# Altium PCB temperature.PcbDoc
Units mm, origin at the board's own origin, x right, y up, seen from the top; angles counter-clockwise.
Board outline 25 x 34.92 mm, 2 copper layers (Top Layer, Bottom Layer); 16 components, 12 nets, 47 pads, 44 vias.
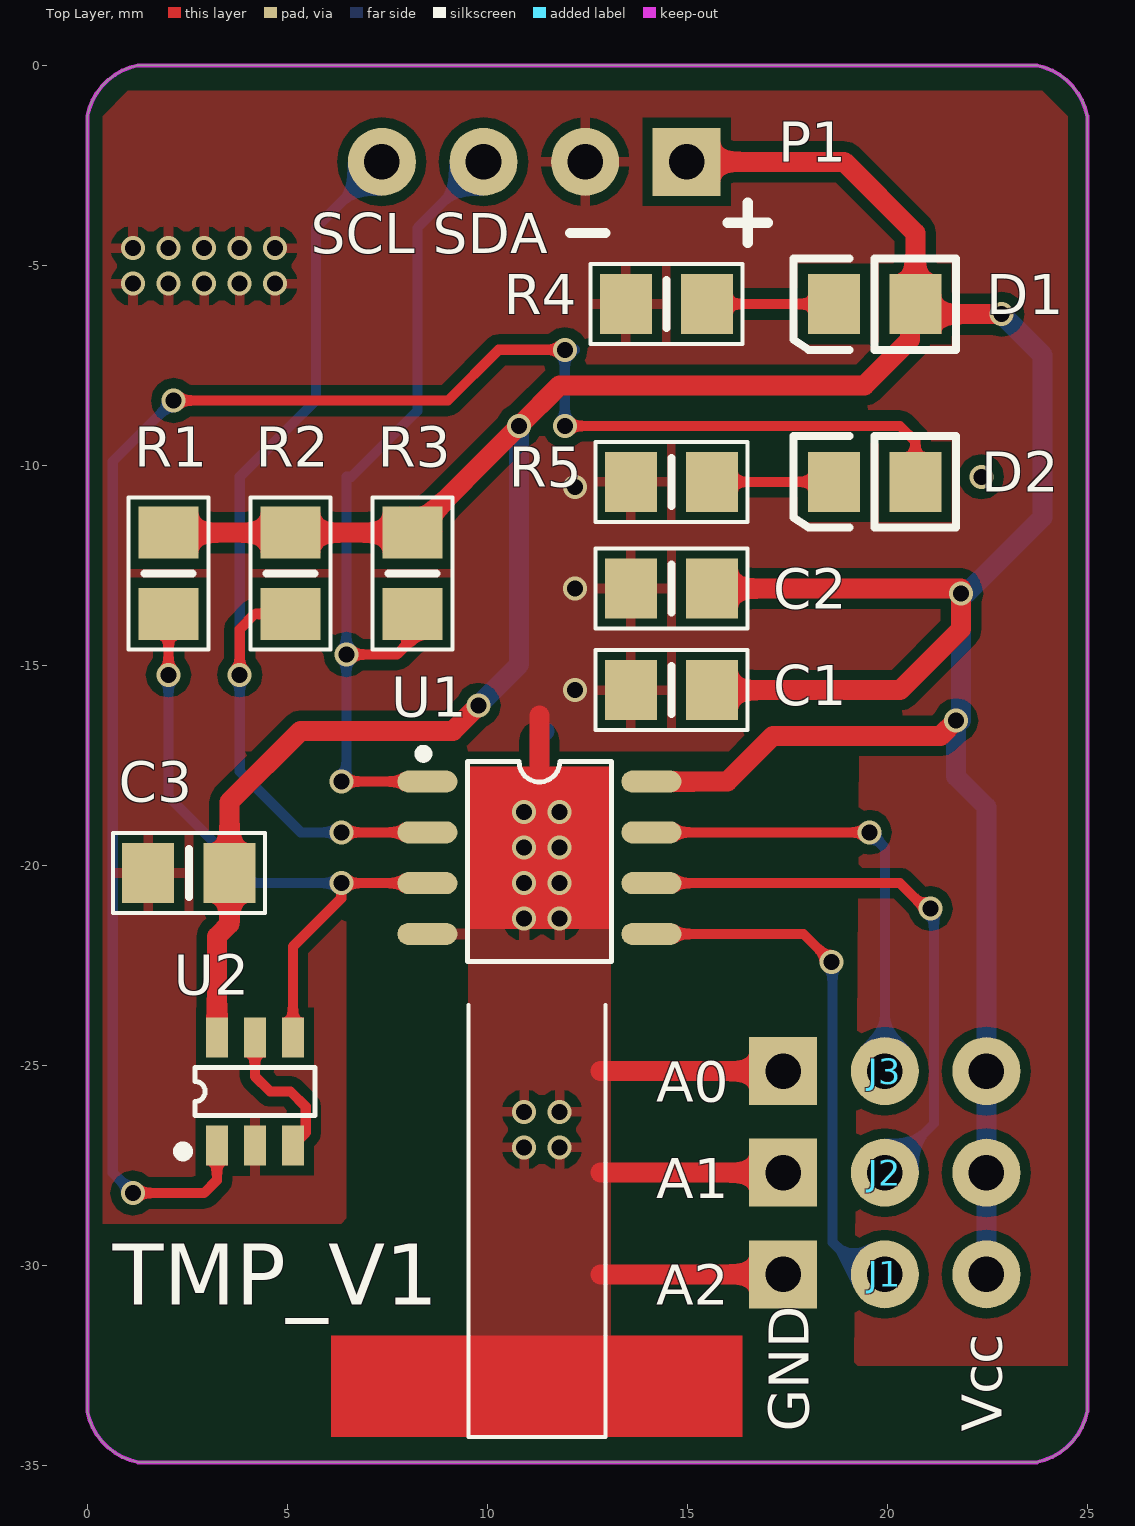
[diagram p0: Top Layer view]
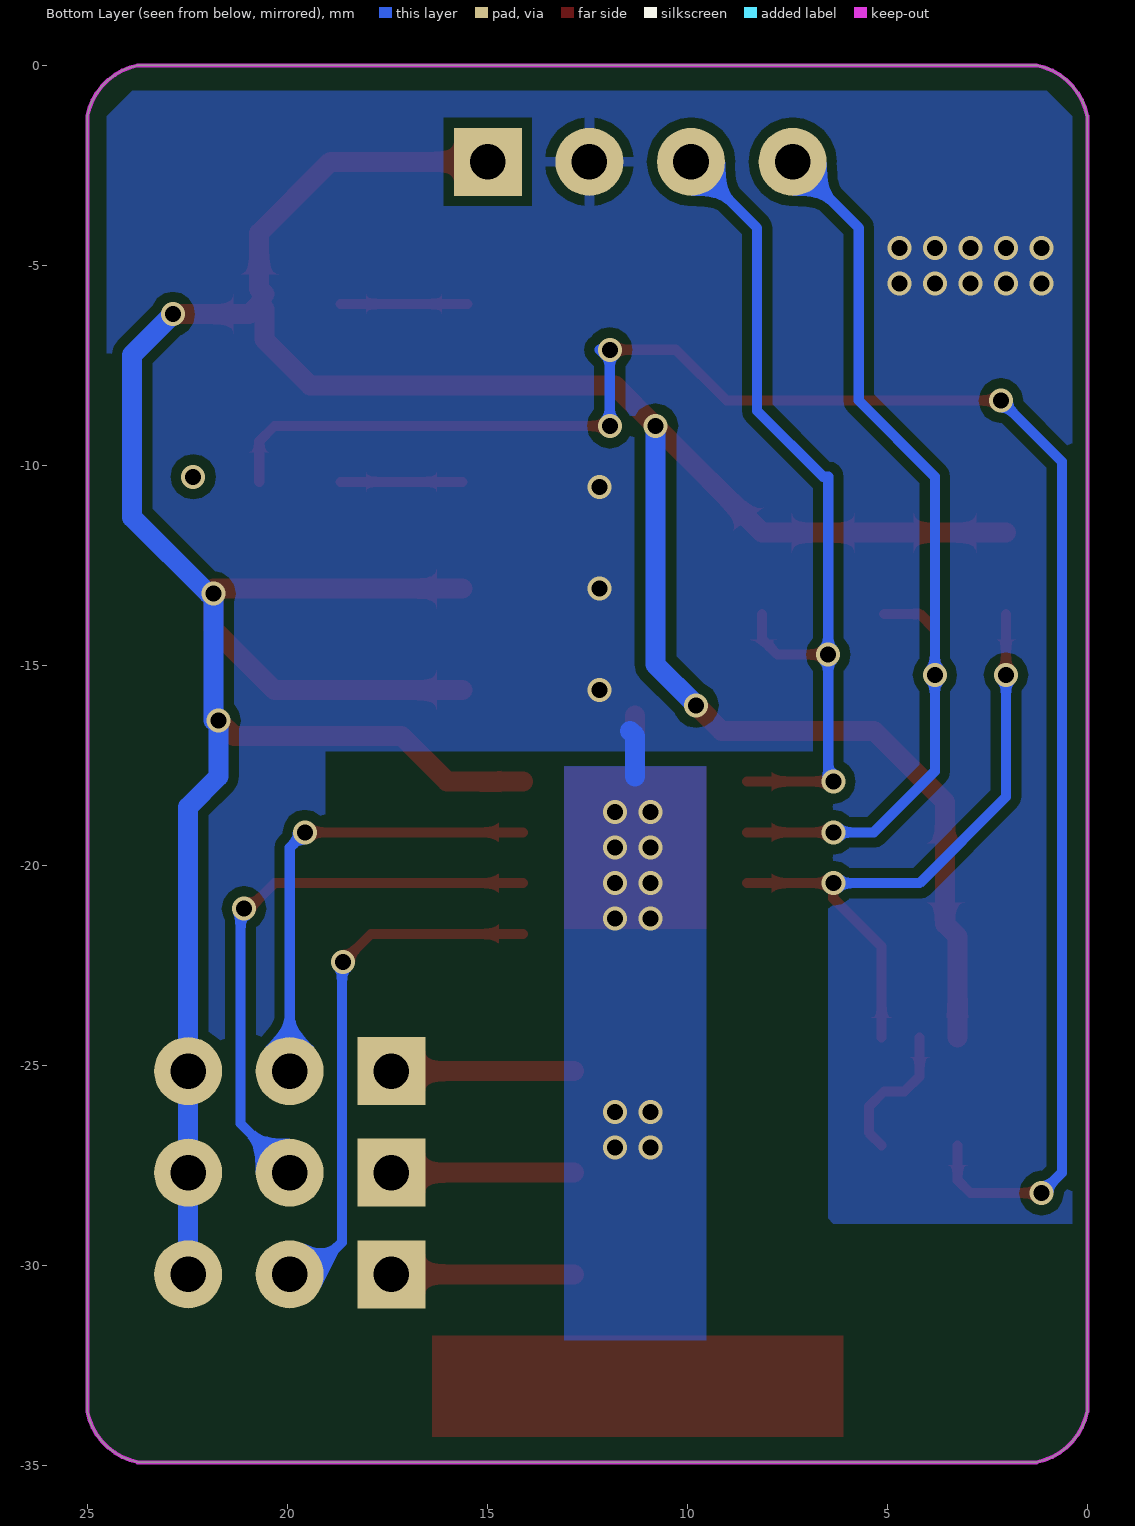
[diagram p1: Bottom Layer view, seen from below]

## Layer stack, top to bottom
Top Solder: solder mask 0.0102, Solder Resist, Dk 3.5
Top Layer: signal copper 0.0356
Dielectric 1: dielectric 0.32, FR-4, Dk 4.8
Bottom Layer: signal copper 0.0356
Bottom Solder: solder mask 0.0102, Solder Resist, Dk 3.5

## Board outline
0,-33.655 ccw(c1.587,-33.337) 1.27,-34.925 23.73,-34.925 ccw(c23.413,-33.337) 25,-33.655 25,-1.27 ccw(c23.413,-1.587) 23.73,0 1.27,0 ccw(c1.587,-1.587) 0,-1.27

## Design rules (kind name [scope] priority, off if disabled: settings)
Clearance [All] p1: gap=0.254
PolygonConnect [All] p1: connectstyle=Relief reliefconductorwidth=0.254 reliefentries=4 polygonreliefangle="90 Angle" airgapwidth=0.254
RoutingVias [All] p1: holewidth=0.45 width=0.7 viastyle="Through Hole" minholewidth=0.3 minwidth=0.5 maxholewidth=0.6 maxwidth=0.8
SolderMaskExpansion [All] p1: expansion=0.102
Width [All] p1: maxlimit=0.5 minlimit=0.254 preferedwidth=0.254
30 further rules are at their usual default settings.

## Components (designator, comment, footprint, x,y, rotation, side; value= is the part's Value field where it differs from the comment)
C1 "CAP" CAP0805 14.605,-15.621 r0 top
C2 "CAP" CAP0805 14.605,-13.081 r0 top
C3 "CAP" CAP0805 2.54,-20.193 r0 top
D1 "LED_GREEN" LED0805 19.685,-5.969 r180 top
D2 "LED_RED" LED0805 19.685,-10.414 r180 top
J1 "A2" PIN3 17.399,-30.226 r0 top
J2 "A1" PIN3 17.399,-27.686 r0 top
J3 "A0" PIN3 17.399,-25.146 r0 top
P1 "PIN4" PIN4 14.986,-2.413 r180 top
R1 "RES" RES0805 2.032,-12.7 r90 top
R2 "RES" RES0805 5.08,-12.7 r90 top
R3 "RES" RES0805 8.128,-12.7 r90 top
R4 "RES" RES0805 14.478,-5.969 r0 top
R5 "RES" RES0805 14.605,-10.414 r0 top
U1 "TMP75C" SOIC8 11.303,-19.812 r0 top
U2 "CMP  SOT23" SOT23-6 4.191,-25.654 r90 top

## Footprints (in the part's own frame and the unit in brackets; to place one, negate y for a bottom-side part, rotate by r counter-clockwise, add the part's x,y. Pads: shape width x height; smd on the part's side, far side on the other; paste and mask are expansions set on the pad)
CAP0805 [mm]
  rect 1.3x1.5 smd: 1(-1.016,0) 2(1.016,0)
  silkscreen extent -1.9,-1 1.9,1, body extent -1.07,-0.7 1.07,0.7, height 0.7
LED0805 [mm]
  rect 1.3x1.5 smd: 1(-1.016,0) 2(1.016,0)
  silkscreen extent -2.03,-1.14 2.03,1.14, body extent -1.07,-0.7 1.07,0.7, height 0.7
PIN3 [mm]
  rect 1.7x1.7 hole 0.89: 1(0,0)
  round 1.7 hole 0.89: 2(2.54,0) 3(5.08,0)
PIN4 [mm]
  rect 1.7x1.7 hole 0.89: 1(0,0)
  round 1.7 hole 0.89: 2(2.54,0) 3(5.08,0) 4(7.62,0)
RES0805 [mm]
  rect 1.3x1.5 smd: 1(-1.016,0) 2(1.016,0)
  silkscreen extent -1.9,-1 1.9,1, body extent -1.07,-0.7 1.07,0.7, height 0.7
SOIC8 [mm]
  oval 1.5x0.55 smd: 1(-2.8,1.905) 2(-2.8,0.635) 3(-2.8,-0.635) 4(-2.8,-1.905) 5(2.8,-1.905) 6(2.8,-0.635) 7(2.8,0.635) 8(2.8,1.905)
  silkscreen extent -3,-2.6 1.8,2.7
SOT23-6 [mm]
  rect 1x0.55 smd: 1(-1.35,0.95) 2(-1.35,0) 3(-1.35,-0.95) 4(1.35,-0.95) 5(1.35,0) 6(1.35,0.95)
  silkscreen extent -1.62,-1.5 0.6,1.92, body extent -1.1,-1.5 1.1,1.5, height 1.7

## Part data
C1 C2 C3: library part CAP1
D1 D2: library part LED
J1 J2 J3: library part "J Jumper_COM_L"
R1 R2 R3 R4 R5: library part RES1
U1: "Digital temperature sensor chip, The lowest power supply 1.8v, Operation temp: -55 to 125"
U2: library part "CMP SOT23", "Comparator with Voltage Reference"

## Via types
v1: diameter 0.6, hole 0.4, Top Layer to Bottom Layer, 44 vias

## Nets (pads, with @x,y where several pads share a name; then routed paths per layer and width w, separated by ;. In a path a pad name is that pad's centre, name@x,y a point inside that pad or via, vN(x,y) a via of type N, cw(c..) or ccw(c..) an arc to the next point about the centre after c; other vN are vias at no path point)
ALERT: R1.1 U1.3 U2.4 | length 16.3
  Top Layer w0.254: v1(2.032,-15.24) R1.1 ; U2.4 5.141,-22.037 6.35,-20.828 v1(6.35,-20.447) U1.3
  Bottom Layer w0.254: v1(2.032,-15.24) 2.032,-18.288 4.191,-20.447 v1(6.35,-20.447)
GND: C1.1 C2.1 C3.1 J1.1 J2.1 J3.1 P1.2 R4.1 R5.1 U1.4 U2.2 | length 16.3
  Top Layer w0.5: 11.303,-17.653 11.303,-16.256 ; 12.827,-30.226 J1.1 ; 12.827,-27.686 J2.1 ; 12.827,-25.146 J3.1
  Bottom Layer w0.5: 11.303,-17.78 11.303,-16.764 11.43,-16.637
  other v1: 10.922,-27.051 11.811,-27.051 10.922,-26.162 11.811,-26.162 10.922,-21.336 11.811,-21.336 10.922,-20.447 11.811,-20.447 10.922,-19.558 11.811,-19.558 10.922,-18.669 11.811,-18.669 12.192,-15.621 12.192,-13.081 12.192,-10.541 1.143,-5.461 2.032,-5.461 2.921,-5.461 3.81,-5.461 4.699,-5.461 1.143,-4.572 2.032,-4.572 2.921,-4.572 3.81,-4.572 4.699,-4.572
NetD1_2: D1.2 R4.2 | length 3.2
  Top Layer w0.254: R4.2 D1.2
NetD2_1: D2.1 U2.1 | length 46
  Top Layer w0.254: v1(1.143,-28.194) 2.921,-28.194 3.241,-27.874 U2.1 ; v1(2.159,-8.382) 9.017,-8.382 10.287,-7.112 v1(11.938,-7.112) ; v1(11.938,-9.017) 20.32,-9.017 20.701,-9.398 D2.1
  Bottom Layer w0.254: v1(1.143,-28.194) 0.635,-27.686 0.635,-9.906 v1(2.159,-8.382) ; v1(11.938,-9.017) 11.938,-7.366 v1@12.192,-7.112
NetD2_2: D2.2 R5.2 | length 3
  Top Layer w0.254: R5.2 D2.2
NetJ1_2: J1.2 U1.5 | length 13.5
  Top Layer w0.254: U1.5 17.907,-21.717 v1(18.605,-22.415)
  Bottom Layer w0.254: v1(18.605,-22.415) 18.63,-22.44 18.63,-29.425 19.431,-30.226 J1.2
NetJ2_2: J2.2 U1.6 | length 14.1
  Top Layer w0.254: U1.6 20.32,-20.447 v1@20.828,-20.955
  Bottom Layer w0.254: J2.2 21.17,-26.455 21.17,-21.17 v1(21.082,-21.082)
NetJ3_2: J3.2 U1.7 | length 11.6
  Top Layer w0.254: U1.7 v1(19.558,-19.177)
  Bottom Layer w0.254: v1(19.558,-19.177) 19.939,-19.558 J3.2
NetU2_3: U2.3 U2.5 | length 3.7
  Top Layer w0.254: U2.5 4.191,-25.273 4.572,-25.654 5.08,-25.654 5.461,-26.035 5.461,-26.684 U2.3
SCL: P1.4 R2.1 U1.2 | length 24.6
  Top Layer w0.254: v1(3.81,-15.24) 3.81,-14.097 4.191,-13.716 R2.1 ; v1(6.35,-19.177) U1.2
  Bottom Layer w0.254: v1(6.35,-19.177) 5.334,-19.177 3.81,-17.653 v1(3.81,-15.24) 3.81,-10.287 5.715,-8.382 5.715,-4.064 P1.4
SDA: P1.3 R3.1 U1.1 | length 21.6
  Top Layer w0.254: v1(6.35,-17.907) U1.1 ; v1(6.477,-14.732) 7.747,-14.732 8.128,-14.351 R3.1
  Bottom Layer w0.254: v1(6.35,-17.907) 6.477,-17.78 v1(6.477,-14.732) 6.477,-10.287 6.604,-10.287 8.255,-8.636 8.255,-4.064 P1.3
VCC: C1.2 C2.2 C3.2 D1.1 J1.3 J2.3 J3.3 P1.1 R1.2 R2.2 R3.2 U1.8 U2.6 | length 100.2
  Top Layer w0.5: R1.2 R2.2 R3.2 v1(10.795,-9.017) 11.811,-8.001 19.431,-8.001 20.574,-6.858 D1.1@20.574,-6.096 ; U2.6 3.241,-21.778 3.556,-21.463 C3.2 3.556,-18.415 5.334,-16.637 9.144,-16.637 v1(9.779,-16.002) ; U1.8 16.002,-17.907 17.145,-16.764 21.336,-16.764 v1(21.717,-16.383) ; P1.1 18.923,-2.413 20.701,-4.191 20.701,-5.588 D1.1@20.574,-5.715 ; C1.2 20.32,-15.621 21.844,-14.097 v1(21.844,-13.208) 21.844,-13.081 C2.2 ; D1.1 20.955,-6.223 v1(22.86,-6.223)
  Bottom Layer w0.5: v1(9.779,-16.002) 10.795,-14.986 v1(10.795,-9.017) ; v1(21.717,-16.383) 21.717,-17.78 22.479,-18.542 J3.3 J2.3 J1.3 ; v1@21.844,-16.383 v1(21.844,-13.208) 21.971,-13.208 23.876,-11.303 23.876,-7.239 v1(22.86,-6.223)
copper on no net:
  other v1: 22.352,-10.287

## Polygon pours and split planes (outlines as drawn)
GND on Top Layer "Keep-Out Layer-No Net" (solid, remove dead copper, pour order 8): 0.381,-1.27 1.016,-0.635 3.683,-0.635 6.477,-0.635 9.398,-0.635 10.922,-0.635 12.446,-0.635 23.876,-0.635 24.511,-1.27 24.511,-17.018 24.511,-32.512 19.177,-32.512 19.304,-17.145 18.288,-17.145 11.938,-17.145 0.381,-17.145
GND on Top Layer "Top Layer-No Net" (solid, pour order 2): 9.525,-21.463 13.081,-21.463 13.081,-34.29 9.525,-34.29
GND on Top Layer "Keep-Out Layer-No Net" (solid, remove dead copper, pour order 10): 0.381,-17.145 0.381,-28.956 6.35,-28.956 6.477,-28.829 6.477,-17.145
GND on Bottom Layer "Keep-Out Layer-No Net" (solid, remove dead copper, pour order 14): 1.27,-0.635 1.016,-0.635 0.381,-1.27 0.381,-28.956 6.35,-28.956 6.477,-28.829 6.477,-17.145 15.367,-17.145 19.05,-17.145 19.05,-31.75 24.511,-31.75 24.511,-17.018 24.511,-1.27 23.876,-0.635
GND on Bottom Layer "Keep-Out Layer-No Net" (solid, pour order 18): 9.525,-17.526 13.081,-17.526 13.081,-31.877 9.525,-31.877 9.525,-17.526

## Keep-outs
Keep-Out Layer:
  lines w0.1: 10,0 10.16,0 ; 23.73,-34.925 ccw(c23.413,-33.337) 25,-33.655 25,-1.27 ccw(c23.413,-1.587) 23.73,0 ; 23.749,-34.925 1.27,-34.925 cw(c1.587,-33.337) 0,-33.655 0,-1.27 cw(c1.587,-1.587) 1.27,0 23.749,0

## Other copper
Top Layer:
  rectangle net GND: 6.096,-34.29 16.383,-31.75
  rectangle net GND: 9.525,-21.59 13.081,-17.526

## Silkscreen, mask and mechanical layers (free items; w line width, h text height)
Top Overlay:
  lines w0.1: 9.525,-23.495 9.525,-34.29 12.954,-34.29 12.954,-23.495
  lines w0.254: 12.065,-4.191 12.954,-4.191 ; 16.002,-3.937 17.018,-3.937 ; 16.51,-4.445 16.51,-3.429
  text "SCL" at 5.588,-4.699 h1
  text "SDA" at 8.636,-4.699 h1
  text "TMP_V1" at 0.635,-30.988 h1.52
  text "GND" at 18.034,-34.163 h1 r90
  text "Vcc" at 22.86,-34.163 h1 r90
Top Solder:
  rectangle: 6.096,-34.29 16.383,-31.75